# Altium PCB PCB1.PcbDoc (part 2 of 2)
Units mm, origin at the board's own origin, x right, y up, seen from the top; angles counter-clockwise.
Board outline 352.42 x 119.06 mm, 2 copper layers (Top Layer, Bottom Layer); 104 components, 225 nets, 1613 pads, 36 vias.
Unrouted connection lines stored in the file: 300.
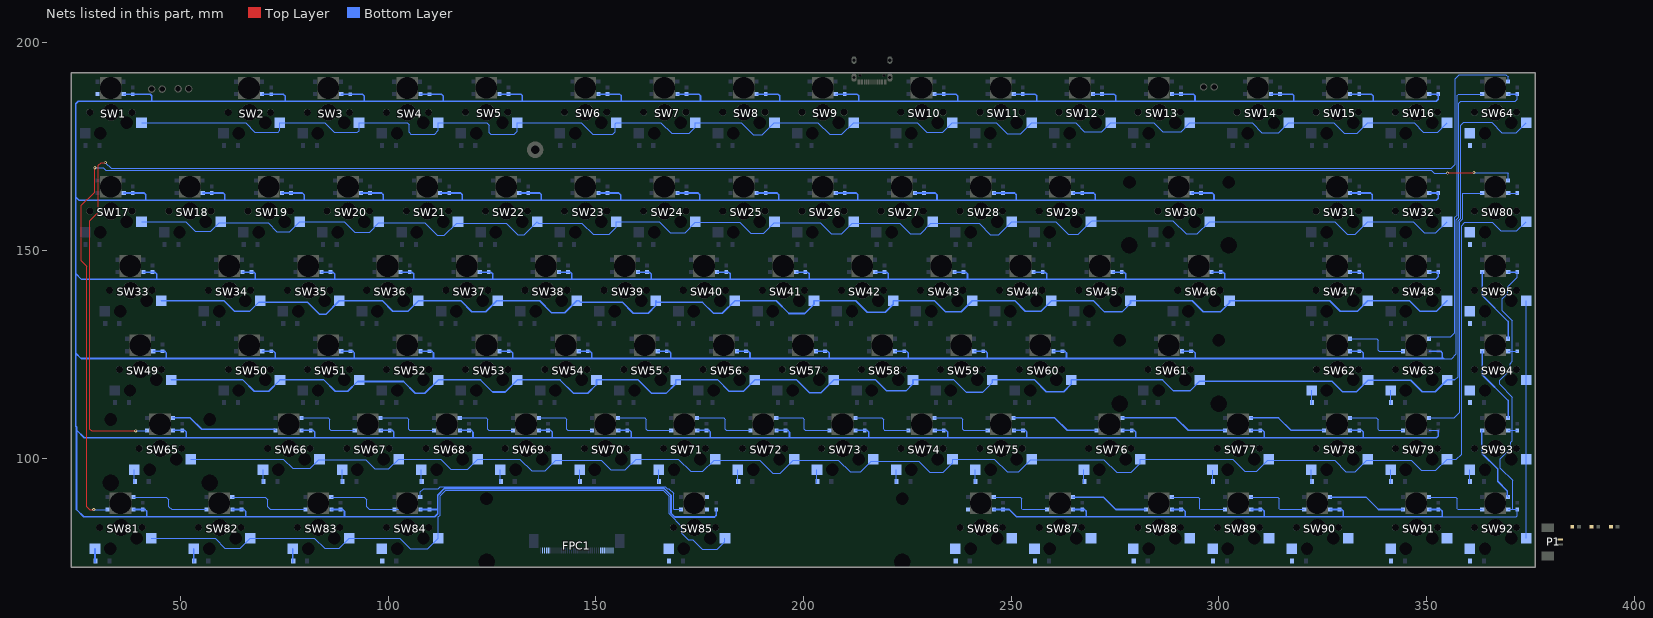
[diagram p2: the nets of this part, all layers, seen from the top]

## Via types
v1: diameter 0.762, hole 0.381, Top Layer to Bottom Layer, 35 vias
v2: diameter 0.635, hole 0.381, Top Layer to Bottom Layer, 1 vias

## Nets (pads, with @x,y where several pads share a name; then routed paths per layer and width w, separated by ;. In a path a pad name is that pad's centre, name@x,y a point inside that pad or via, vN(x,y) a via of type N, cw(c..) or ccw(c..) an arc to the next point about the centre after c; other vN are vias at no path point) (continued)
NetSW62_2: SW62.2 SW62.3 | length 3.3
  Bottom Layer w0.254: SW62.3@322.351,113.077 SW62.2@322.351,116.332
NetSW62_6: SW62.6 SW63.8 | length 15.5
  Bottom Layer w0.254: SW62.6@331.597,128.778 338.023,128.778 338.404,128.397 338.404,126.009 338.633,125.781 SW63.8@344.424,125.781
NetSW63_2: SW63.2 SW63.3 | length 3.3
  Bottom Layer w0.254: SW63.3@341.389,113.077 SW63.2@341.389,116.332
NetSW63_6: SW63.6 SW64.8 | length 70.4
  Bottom Layer w0.254: SW63.6@350.634,128.778 351.091,129.235 355.879,129.235 356.845,130.2 356.845,157.988 357.429,158.572 357.429,187.376 357.759,187.706 SW64.8@363.449,187.706
NetSW64_2: SW64.2 SW64.3
NetSW64_6: SW64.6 SW65.8 | length 441.4
  Top Layer w0.254: v1(31.953,171.221) 30.937,171.221 30.277,170.561 30.277,159.258 28.194,157.175 28.194,107.036 28.626,106.604 v1(39.268,106.604)
  Bottom Layer w0.254: v1(31.953,171.221) 33.299,169.875 356.006,169.875 356.972,170.84 356.972,191.44 357.937,192.405 369.087,192.405 369.672,191.821 SW64.6@369.672,190.703 ; v1(39.268,106.604) 41.834,106.604 SW65.8@41.961,106.731
NetSW65_2: SW65.2 SW65.3 | length 3.3
  Bottom Layer w0.254: SW65.3@38.938,94.027 SW65.2@38.938,97.282
NetSW65_6: SW65.6 SW66.8 | length 26
  Bottom Layer w0.381: SW65.6@48.184,109.728 52.4,109.728 55.143,106.985 72.669,106.985 SW66.8@72.923,106.731
NetSW66_2: SW66.2 SW66.3 | length 3.3
  Bottom Layer w0.254: SW66.3@69.901,94.027 SW66.2@69.901,97.282
NetSW66_6: SW66.6 SW67.8 | length 15.5
  Bottom Layer w0.254: SW66.6@79.121,109.728 85.547,109.728 85.928,109.347 85.928,106.959 86.157,106.731 SW67.8@91.948,106.731
NetSW67_2: SW67.2 SW67.3 | length 3.3
  Bottom Layer w0.254: SW67.3@88.954,94.027 SW67.2@88.954,97.282
NetSW67_6: SW67.6 SW68.8 | length 15.5
  Bottom Layer w0.254: SW67.6@98.174,109.728 104.6,109.728 104.981,109.347 104.981,106.959 105.21,106.731 SW68.8@111.001,106.731
NetSW68_2: SW68.2 SW68.3 | length 3.3
  Bottom Layer w0.254: SW68.3@108.006,94.027 SW68.2@108.006,97.282
NetSW68_6: SW68.6 SW69.8 | length 15.5
  Bottom Layer w0.254: SW68.6@117.227,109.728 123.653,109.728 124.034,109.347 124.034,106.959 124.262,106.731 SW69.8@130.054,106.731
NetSW69_2: SW69.2 SW69.3 | length 3.3
  Bottom Layer w0.254: SW69.3@127.059,94.027 SW69.2@127.059,97.282
NetSW69_6: SW69.6 SW70.8 | length 15.5
  Bottom Layer w0.254: SW69.6@136.279,109.728 142.706,109.728 143.087,109.347 143.087,106.959 143.315,106.731 SW70.8@149.106,106.731
NetSW70_2: SW70.2 SW70.3 | length 3.3
  Bottom Layer w0.254: SW70.3@146.112,94.027 SW70.2@146.112,97.282
NetSW70_6: SW70.6 SW71.8 | length 15.5
  Bottom Layer w0.254: SW70.6@155.332,109.728 161.758,109.728 162.139,109.347 162.139,106.959 162.368,106.731 SW71.8@168.159,106.731
NetSW71_2: SW71.2 SW71.3 | length 3.3
  Bottom Layer w0.254: SW71.3@165.165,94.027 SW71.2@165.165,97.282
NetSW71_6: SW71.6 SW72.8 | length 15.5
  Bottom Layer w0.254: SW71.6@174.385,109.728 180.811,109.728 181.192,109.347 181.192,106.959 181.421,106.731 SW72.8@187.212,106.731
NetSW72_2: SW72.2 SW72.3 | length 3.3
  Bottom Layer w0.254: SW72.3@184.218,94.027 SW72.2@184.218,97.282
NetSW72_6: SW72.6 SW73.8 | length 15.5
  Bottom Layer w0.254: SW72.6@193.438,109.728 199.864,109.728 200.245,109.347 200.245,106.959 200.474,106.731 SW73.8@206.265,106.731
NetSW73_2: SW73.2 SW73.3 | length 3.3
  Bottom Layer w0.254: SW73.3@203.271,94.027 SW73.2@203.271,97.282
NetSW73_6: SW73.6 SW74.8 | length 15.5
  Bottom Layer w0.254: SW73.6@212.491,109.728 218.917,109.728 219.298,109.347 219.298,106.959 219.527,106.731 SW74.8@225.318,106.731
NetSW74_2: SW74.2 SW74.3 | length 3.3
  Bottom Layer w0.254: SW74.3@222.323,94.027 SW74.2@222.323,97.282
NetSW74_6: SW74.6 SW75.8 | length 15.5
  Bottom Layer w0.254: SW74.6@231.544,109.728 237.97,109.728 238.351,109.347 238.351,106.959 238.579,106.731 SW75.8@244.371,106.731
NetSW75_2: SW75.2 SW75.3 | length 3.3
  Bottom Layer w0.254: SW75.3@241.376,94.027 SW75.2@241.376,97.282
NetSW75_6: SW75.6 SW76.8 | length 21.2
  Bottom Layer w0.381: SW75.6@250.622,109.728 260.528,109.728 263.525,106.731 SW76.8@270.586,106.731
NetSW76_2: SW76.2 SW76.3 | length 3.3
  Bottom Layer w0.254: SW76.3@267.564,94.027 SW76.2@267.564,97.282
NetSW76_6: SW76.6 SW77.8 | length 26
  Bottom Layer w0.381: SW76.6@276.809,109.728 289.636,109.728 292.633,106.731 SW77.8@301.523,106.731
NetSW77_2: SW77.2 SW77.3 | length 3.3
  Bottom Layer w0.254: SW77.3@298.602,93.849 SW77.2@298.602,97.104
NetSW77_6: SW77.6 SW78.8 | length 18.8
  Bottom Layer w0.381: SW77.6@307.746,109.728 314.401,109.728 317.398,106.731 SW78.8@325.349,106.731
NetSW78_2: SW78.2 SW78.3 | length 3.3
  Bottom Layer w0.254: SW78.3@322.326,94.027 SW78.2@322.326,97.282
NetSW78_6: SW78.6 SW79.8 | length 15.5
  Bottom Layer w0.254: SW78.6@331.546,109.728 337.972,109.728 338.353,109.347 338.353,106.959 338.582,106.731 SW79.8@344.373,106.731
NetSW79_2: SW79.2 SW79.3 | length 3.3
  Bottom Layer w0.254: SW79.3@341.376,94.027 SW79.2@341.376,97.282
NetSW79_6: SW79.6 SW80.8 | length 65.8
  Bottom Layer w0.254: SW79.6@350.622,109.728 356.743,109.728 358.064,111.049 358.064,156.912 358.8,157.648 358.8,163.881 SW80.8@363.449,163.881
NetSW80_2: SW80.2 SW80.3
NetSW80_6: SW80.6 SW81.8 | length 431.4
  Top Layer w0.254: v1(29.134,87.655) 28.169,87.655 27.432,88.392 27.432,146.304 26.187,147.549 26.187,160.884 29.413,164.109 v1(29.413,169.977) ; v1(355.092,168.681) 355.194,168.783 v1(361.442,168.783)
  Bottom Layer w0.254: v1(29.134,87.655) SW81.8@32.436,87.655 ; v1(29.413,169.977) 31.471,169.977 32.055,169.393 351.155,169.393 351.866,168.681 v1(355.092,168.681) ; v1(361.442,168.783) 369.57,168.783 369.672,168.681 SW80.6@369.672,166.878
NetSW81_2: SW81.2 SW81.3 | length 3.3
  Bottom Layer w0.381: SW81.3@29.439,74.977 SW81.2@29.439,78.232
NetSW81_6: SW81.6 SW82.8 | length 19.8
  Bottom Layer w0.254: SW81.6@38.684,90.678 46.609,90.678 47.219,90.068 47.219,88.341 47.879,87.681 SW82.8@56.274,87.681
NetSW82_2: SW82.2 SW82.3 | length 3.3
  Bottom Layer w0.381: SW82.3@53.251,74.977 SW82.2@53.251,78.232
NetSW82_6: SW82.6 SW83.8 | length 19.8
  Bottom Layer w0.254: SW82.6@62.497,90.678 70.421,90.678 71.031,90.068 71.031,88.341 71.691,87.681 SW83.8@80.086,87.681
NetSW83_2: SW83.2 SW83.3 | length 3.3
  Bottom Layer w0.381: SW83.3@77.064,74.977 SW83.2@77.064,78.232
NetSW83_6: SW83.6 SW84.8 | length 19.8
  Bottom Layer w0.254: SW83.6@86.309,90.678 94.234,90.678 94.844,90.068 94.844,88.341 95.504,87.681 103.899,87.681
NetSW84_2: SW84.2 SW84.3
NetSW84_6: SW84.6 SW85.8 | length 69.1
  Bottom Layer w0.254: SW84.6@107.747,90.678 107.747,91.923 108.56,92.735 112.065,92.735 112.535,93.205 166.717,93.205 167.187,92.735 167.589,92.735 168.758,91.567 168.758,87.782 168.859,87.681 SW85.8@170.561,87.681
NetSW85_2: SW85.2 SW85.3
NetSW85_6: SW85.6 SW86.8
NetSW86_2: SW86.2 SW86.3
NetSW86_6: SW86.6 SW87.8 | length 15.5
  Bottom Layer w0.254: SW86.6@245.821,90.678 252.247,90.678 252.628,90.297 252.628,87.909 252.857,87.681 SW87.8@258.648,87.681
NetSW87_2: SW87.2 SW87.3
NetSW87_6: SW87.6 SW88.8 | length 18.8
  Bottom Layer w0.381: SW87.6@264.897,90.678 272.212,90.678 275.209,87.681 SW88.8@282.473,87.681
NetSW88_2: SW88.2 SW88.3
NetSW88_6: SW88.6 SW89.8 | length 15.5
  Bottom Layer w0.254: SW88.6@288.671,90.678 295.097,90.678 295.478,90.297 295.478,87.909 295.707,87.681 SW89.8@301.498,87.681
NetSW89_2: SW89.2 SW89.3
NetSW89_6: SW89.6 SW90.8 | length 15.5
  Bottom Layer w0.254: SW89.6@307.746,90.678 314.173,90.678 314.554,90.297 314.554,87.909 314.782,87.681 SW90.8@320.573,87.681
NetSW90_2: SW90.2 SW90.3
NetSW90_6: SW90.6 SW91.8 | length 18.8
  Bottom Layer w0.381: SW90.6@326.822,90.678 335.483,90.678 338.48,87.681 SW91.8@344.399,87.681
NetSW91_2: SW91.2 SW91.3
NetSW91_6: SW91.6 SW92.8 | length 15.5
  Bottom Layer w0.254: SW91.6@350.596,90.678 357.022,90.678 357.403,90.297 357.403,87.909 357.632,87.681 SW92.8@363.423,87.681
NetSW92_2: SW92.2 SW92.3
NetSW92_6: SW92.6 SW93.8 | length 18.7
  Bottom Layer w0.381: SW93.8@363.449,106.731 363.322,106.604 363.322,101.244 367.157,97.409 367.157,94.456 369.516,92.097 369.516,90.834 SW92.6@369.672,90.678
NetSW93_2: SW93.2 SW93.3 | length 3.3
  Bottom Layer w0.254: SW93.3@360.426,94.027 SW93.2@360.426,97.282
NetSW93_6: SW93.6 SW94.8 | length 18.6
  Bottom Layer w0.381: SW94.8@363.449,125.781 363.449,120.142 369.672,113.919 SW93.6@369.672,109.728
NetSW94_2: SW94.2 SW94.3
NetSW94_6: SW94.6 SW95.8 | length 18.6
  Bottom Layer w0.381: SW95.8@363.449,144.831 363.449,139.192 369.672,132.969 SW94.6@369.672,128.778
NetSW95_2: SW95.2 SW95.3
PD+: FPC1.32
PD-: FPC1.33
RGB: FPC1.34 SW1.8
ROW1: FPC1.1 SW1.1 SW2.1 SW3.1 SW4.1 SW5.1 SW6.1 SW7.1 SW8.1 SW9.1 SW10.1 SW11.1 SW12.1 SW13.1 SW14.1 SW15.1 SW16.1 | length 353.5
  Bottom Layer w0.254: SW1.1@40.64,180.772 65.684,180.772 67.92,178.537 73.558,178.537 73.965,178.943 SW2.1@73.965,180.772 84.785,180.772 87.071,178.486 92.608,178.486 93.015,178.892 SW3.1@93.015,180.772 104.597,180.772 105.054,180.315 105.054,178.537 105.512,178.079 111.201,178.079 112.065,178.943 SW4.1@112.065,180.772 123.825,180.772 124.409,180.188 124.409,178.333 124.739,178.003 130.327,178.003 131.115,178.791 SW5.1@131.115,180.797 146.558,180.797 149.301,178.054 154.102,178.054 154.686,178.638 154.686,180.543 SW6.1@154.94,180.797 165.684,180.797 168.25,178.232 172.542,178.232 173.99,179.68 SW7.1@173.99,180.797 184.988,180.797 187.909,177.876 190.119,177.876 SW8.1@193.04,180.797 203.505,180.797 206.324,177.978 209.271,177.978 SW9.1@212.09,180.797 227.457,180.797 229.743,178.511 233.604,178.511 SW10.1@235.89,180.797 246.456,180.797 249.047,178.206 252.349,178.206 SW11.1@254.94,180.797 265.557,180.797 267.665,178.689 271.882,178.689 SW12.1@273.99,180.797 284.378,180.797 286.487,178.689 290.932,178.689 SW13.1@293.04,180.797 308.026,180.797 310.388,178.435 314.503,178.435 SW14.1@316.865,180.797 327.66,180.797 330.175,178.283 333.4,178.283 SW15.1@335.915,180.797 347.066,180.797 349.301,178.562 352.73,178.562 SW16.1@354.965,180.797
ROW2: FPC1.2 SW17.1 SW18.1 SW19.1 SW20.1 SW21.1 SW22.1 SW23.1 SW24.1 SW25.1 SW26.1 SW27.1 SW28.1 SW29.1 SW30.1 SW31.1 SW32.1 | length 348.9
  Bottom Layer w0.254: SW17.1@40.64,156.972 51.283,156.972 53.619,154.635 57.353,154.635 59.385,156.667 71.12,156.667 73.254,154.534 76.302,154.534 SW19.1@78.74,156.972 89.459,156.972 91.999,154.432 95.555,154.432 97.79,156.667 108.89,156.667 111.836,153.721 113.589,153.721 116.484,156.616 128.448,156.616 131.191,153.873 132.791,153.873 SW22.1@135.89,156.972 136.22,156.642 146.685,156.642 149.377,153.949 153.238,153.949 154.94,155.651 SW23.1@154.94,156.972 165.252,156.972 167.919,154.305 171.501,154.305 173.99,156.794 184.709,156.794 187.325,154.178 190.475,154.178 193.04,156.743 204.013,156.743 206.654,154.102 209.22,154.102 211.76,156.642 223.241,156.642 225.755,154.127 228.295,154.127 230.708,156.54 242.367,156.54 245.034,153.873 247.091,153.873 SW28.1@250.19,156.972 260.706,156.972 263.728,153.949 266.217,153.949 SW29.1@269.24,156.972 269.519,157.251 288.95,157.251 292.176,154.026 294.869,154.026 SW30.1@297.815,156.972 327.939,156.972 330.987,153.924 332.867,153.924 SW31.1@335.915,156.972 346.812,156.972 349.504,154.28 352.273,154.28 SW32.1@354.965,156.972
ROW3: FPC1.3 SW33.1 SW34.1 SW35.1 SW36.1 SW37.1 SW38.1 SW39.1 SW40.1 SW41.1 SW42.1 SW43.1 SW44.1 SW45.1 SW46.1 SW47.1 SW48.1 | length 345.4
  Bottom Layer w0.381: SW33.1@45.415,137.922 60.477,137.922 62.941,135.458 66.751,135.458 68.834,137.541 80.645,137.541 83.49,134.696 85.039,134.696 SW35.1@88.265,137.922 98.654,137.922 101.143,135.433 104.826,135.433 SW36.1@107.315,137.922 117.551,137.922 120.167,135.306 123.546,135.306 126.162,137.922 SW37.1@126.365,137.922 136.525,137.922 139.37,135.077 142.57,135.077 SW38.1@145.415,137.922 145.999,137.922 146.304,137.617 156.388,137.617 159.055,134.95 162.636,134.95 164.465,136.779 SW39.1@164.465,137.922 164.846,137.541 175.717,137.541 178.359,134.899 180.492,134.899 SW40.1@183.515,137.922 193.472,137.922 196.52,134.874 200.355,134.874 202.565,137.084 SW41.1@202.565,137.922 212.623,137.922 215.367,135.179 219.71,135.179 221.615,137.084 SW42.1@221.615,137.922 231.572,137.922 234.213,135.28 238.023,135.28 SW43.1@240.665,137.922 250.952,137.922 253.441,135.433 257.226,135.433 SW44.1@259.715,137.922 269.85,137.922 272.517,135.255 276.708,135.255 278.765,137.312 SW45.1@278.765,137.922 293.649,137.922 296.266,135.306 300.406,135.306 302.59,137.49 SW46.1@302.59,137.922 326.72,137.922 329.235,135.407 333.4,135.407 SW47.1@335.915,137.922 345.948,137.922 348.463,135.407 352.45,135.407 SW48.1@354.965,137.922
ROW4: FPC1.4 SW49.1 SW50.1 SW51.1 SW52.1 SW53.1 SW54.1 SW55.1 SW56.1 SW57.1 SW58.1 SW59.1 SW60.1 SW61.1 SW62.1 SW63.1 SW64.1 | length 424.7
  Bottom Layer w0.254: 356.832,118.872 357.657,119.697 357.657,157.251 358.242,157.836 358.242,180.213 358.953,180.924 365.709,180.924 368.198,178.435 371.653,178.435 SW64.1@374.015,180.797
  Bottom Layer w0.381: SW49.1@47.777,118.872 65.049,118.872 67.767,116.154 71.272,116.154 SW50.1@73.99,118.872 84.557,118.872 87.274,116.154 90.322,116.154 92.659,118.491 103.734,118.491 106.578,115.646 108.864,115.646 SW52.1@112.09,118.872 122.276,118.872 125.171,115.976 128.245,115.976 SW53.1@131.14,118.872 141.427,118.872 144.628,115.672 148.107,115.672 150.19,117.754 SW54.1@150.19,118.872 160.249,118.872 163.5,115.621 166.929,115.621 169.24,117.932 SW55.1@169.24,118.872 179.426,118.872 182.118,116.18 185.598,116.18 SW56.1@188.29,118.872 198.374,118.872 201.422,115.824 204.292,115.824 SW57.1@207.34,118.872 217.424,118.872 220.066,116.23 224.688,116.23 226.39,117.932 SW58.1@226.39,118.872 236.245,118.872 239.166,115.951 243.23,115.951 245.44,118.161 SW59.1@245.44,118.872 255.676,118.872 258.496,116.053 262.661,116.053 264.49,117.881 SW60.1@264.49,118.872 286.461,118.872 289.103,116.23 293.091,116.23 295.453,118.593 327.203,118.593 329.717,116.078 333.248,116.078 335.94,118.77 346.227,118.77 348.996,116.002 352.108,116.002 354.927,118.821 SW63.1@354.978,118.821 ; SW63.1@354.978,118.872 356.832,118.872
ROW5: FPC1.5 SW65.1 SW66.1 SW67.1 SW68.1 SW69.1 SW70.1 SW71.1 SW72.1 SW73.1 SW74.1 SW75.1 SW76.1 SW77.1 SW78.1 SW79.1 SW80.1 | length 411.4
  Bottom Layer w0.254: SW65.1@52.527,99.822 74.752,99.822 77.013,97.561 81.229,97.561 83.312,99.644 94.666,99.644 96.825,97.485 100.206,97.485 SW67.1@102.543,99.822 112.649,99.822 115.113,97.358 119.132,97.358 SW68.1@121.595,99.822 131.699,99.822 134.544,96.977 137.803,96.977 140.343,99.517 151.384,99.517 153.619,97.282 157.161,97.282 SW70.1@159.701,99.822 169.926,99.822 172.898,96.85 175.782,96.85 178.5,99.568 189.509,99.568 192.659,96.418 194.403,96.418 197.553,99.568 208.432,99.568 211.252,96.749 213.786,96.749 216.352,99.314 227.762,99.314 230.403,96.672 233.68,96.672 235.912,98.905 SW74.1@235.912,99.822 245.974,99.822 249.047,96.749 251.892,96.749 254.787,99.644 272.364,99.644 275.412,96.596 278.892,96.596 281.153,98.857 SW76.1@281.153,99.822 303.352,99.822 306.299,96.876 309.143,96.876 311.785,99.517 327.889,99.517 330.606,96.799 332.892,96.799 335.636,99.543 346.38,99.543 348.767,97.155 352.298,97.155 SW79.1@354.965,99.822 357.251,99.822 358.47,101.041 358.47,155.981 359.283,156.794 365.887,156.794 367.944,154.737 371.78,154.737 SW80.1@374.015,156.972
ROW6: FPC1.6 pad.4@123.723,75.057 SW81.1 SW82.1 SW83.1 SW84.1 SW85.1 SW86.1 SW87.1 SW88.1 SW89.1 SW90.1 SW91.1 SW92.1 SW93.1 SW94.1 SW95.1 | length 222.7
  Bottom Layer w0.254: SW81.1@43.028,80.772 58.344,80.772 60.731,78.384 64.453,78.384 SW82.1@66.84,80.772 82.271,80.772 84.709,78.334 88.214,78.334 SW83.1@90.653,80.772 102.87,80.772 105.385,78.257 109.576,78.257 SW84.1@112.09,80.772 112.09,85.877 112.547,86.335 112.547,90.932 113.881,92.266 166.281,92.266 167.653,90.894 167.653,86.597 170.713,83.536 170.713,81.966 172.263,80.416 173.304,80.416 175.641,78.08 179.273,78.08 181.127,79.934 SW85.1@181.127,80.772 ; SW92.1@374.015,80.772 SW93.1@374.015,99.822 SW94.1@374.015,118.872 SW95.1@374.015,137.922
ROW7: FPC1.7
V3_3: FPC1.35 R1.1 R2.1 R3.1
VBAT: P1.2
VBUS: SW1.5 SW2.5 SW3.5 SW4.5 SW5.5 SW6.5 SW7.5 SW8.5 SW9.5 SW10.5 SW11.5 SW12.5 SW13.5 SW14.5 SW15.5 SW16.5 SW17.5 SW18.5 SW19.5 SW20.5 SW21.5 SW22.5 SW23.5 SW24.5 SW25.5 SW26.5 SW27.5 SW28.5 SW29.5 SW30.5 SW31.5 SW32.5 SW33.5 SW34.5 SW35.5 SW36.5 SW37.5 SW38.5 SW39.5 SW40.5 SW41.5 SW42.5 SW43.5 SW44.5 SW45.5 SW46.5 SW47.5 SW48.5 SW49.5 SW50.5 SW51.5 SW52.5 SW53.5 SW54.5 SW55.5 SW56.5 SW57.5 SW58.5 SW59.5 SW60.5 SW61.5 SW62.5 SW64.5 SW65.5 SW66.5 SW67.5 SW68.5 SW69.5 SW70.5 SW71.5 SW72.5 SW73.5 SW74.5 SW75.5 SW76.5 SW77.5 SW78.5 SW80.5 SW81.5 SW82.5 SW83.5 SW84.5 SW85.5 SW86.5 SW87.5 SW88.5 SW89.5 SW90.5 SW91.5 SW92.5 SW93.5 SW94.5 SW95.5 | length 2664.7
  Bottom Layer w0.254: 350.672,106.731 352.857,106.731 ; 353.822,85.954 371.678,85.954 371.907,86.182 SW92.5@371.907,87.681 ; 354.127,124.028 356.057,124.028 357.251,125.222 357.251,157.48 357.835,158.064 357.835,185.445 358.318,185.928 371.399,185.928 371.907,186.436 SW64.5@371.907,187.706 ; SW92.5@369.722,87.681 370.738,87.681 ; SW93.5@369.722,106.731 370.713,106.731 ; SW94.5@369.722,125.781 370.688,125.781 ; SW80.5@369.722,163.881 SW80.5@371.907,163.881 ; SW92.5@371.856,87.681 370.738,87.681 ; SW93.5@371.907,106.731 370.713,106.731 ; SW94.5@371.907,125.781 370.688,125.781 ; SW95.5@371.907,144.831 371.907,143.612 369.595,141.3 369.595,139.776 368.249,138.43 368.249,135.56 370.688,133.121 370.688,125.781 ; 370.688,125.781 370.688,123.317 370.192,122.822 370.192,121.323 367.614,118.745 367.614,117.856 370.713,114.757 370.713,106.731 ; 370.713,106.731 370.713,104.216 370.332,103.835 370.332,102.387 367.843,99.898 367.843,97.561 370.738,94.666 370.738,87.681
  Bottom Layer w0.381: SW17.5@36.347,163.881 SW17.5@38.532,163.881 41.275,163.881 41.681,163.474 41.681,162.128 ; SW1.5@36.347,187.681 SW1.5@38.532,187.681 42.723,187.681 43.104,187.3 43.104,185.953 ; SW81.5@38.735,87.681 41.478,87.681 41.885,87.274 41.885,85.928 ; SW33.5@41.123,144.831 43.866,144.831 44.272,144.424 44.272,143.078 ; SW49.5@43.485,125.781 46.228,125.781 46.634,125.374 46.634,124.028 ; SW65.5@48.235,106.731 50.978,106.731 51.384,106.324 51.384,104.978 ; SW18.5@55.397,163.881 SW18.5@57.582,163.881 60.325,163.881 60.731,163.474 60.731,162.128 ; SW82.5@62.547,87.681 65.291,87.681 65.697,87.274 65.697,85.928 ; SW34.5@64.922,144.831 67.666,144.831 68.072,144.424 68.072,143.078 ; SW2.5@69.672,187.681 SW2.5@71.857,187.681 74.778,187.681 75.209,187.249 75.209,185.953 ; SW50.5@69.698,125.781 72.441,125.781 72.847,125.374 72.847,124.028 ; SW19.5@74.447,163.881 SW19.5@76.632,163.881 79.375,163.881 79.781,163.474 79.781,162.128 ; SW66.5@79.197,106.731 81.94,106.731 82.347,106.324 82.347,104.978 ; SW35.5@83.972,144.831 86.716,144.831 87.122,144.424 87.122,143.078 ; SW83.5@86.36,87.681 89.103,87.681 89.51,87.274 89.51,85.928 ; SW3.5@88.722,187.681 SW3.5@90.907,187.681 93.828,187.681 94.259,187.249 94.259,185.953 ; SW51.5@88.748,125.781 91.491,125.781 91.897,125.374 91.897,124.028 ; SW20.5@93.497,163.881 SW20.5@95.682,163.881 98.425,163.881 98.831,163.474 98.831,162.128 ; SW67.5@98.25,106.731 100.993,106.731 101.4,106.324 101.4,104.978 ; SW36.5@103.022,144.831 105.766,144.831 106.172,144.424 106.172,143.078 ; SW4.5@107.772,187.681 SW4.5@109.957,187.681 112.878,187.681 113.309,187.249 113.309,185.953 ; SW84.5@107.798,87.681 SW84.5@109.982,87.681 111.912,87.681 ; SW52.5@107.798,125.781 110.541,125.781 110.947,125.374 110.947,124.028 ; SW21.5@112.547,163.881 SW21.5@114.732,163.881 117.475,163.881 117.881,163.474 117.881,162.128 ; SW68.5@117.303,106.731 120.046,106.731 120.452,106.324 120.452,104.978 ; SW37.5@122.072,144.831 124.816,144.831 125.222,144.424 125.222,143.078 ; SW5.5@126.822,187.706 SW5.5@129.007,187.706 131.928,187.706 132.359,187.274 132.359,185.979 ; SW53.5@126.848,125.781 129.591,125.781 129.997,125.374 129.997,124.028 ; SW22.5@131.597,163.881 SW22.5@133.782,163.881 136.525,163.881 136.931,163.474 136.931,162.128 ; SW69.5@136.356,106.731 139.099,106.731 139.505,106.324 139.505,104.978 ; SW38.5@141.122,144.831 143.866,144.831 144.272,144.424 144.272,143.078 ; SW54.5@145.898,125.781 148.641,125.781 149.047,125.374 149.047,124.028 ; SW23.5@150.647,163.881 SW23.5@152.832,163.881 155.575,163.881 155.981,163.474 155.981,162.128 ; SW6.5@150.647,187.706 SW6.5@152.832,187.706 155.753,187.706 156.185,187.274 156.185,185.979 ; SW70.5@155.408,106.731 158.152,106.731 158.558,106.324 158.558,104.978 ; SW39.5@160.172,144.831 162.916,144.831 163.322,144.424 163.322,143.078 ; SW55.5@164.948,125.781 167.691,125.781 168.097,125.374 168.097,124.028 ; SW24.5@169.697,163.881 SW24.5@171.882,163.881 174.625,163.881 175.031,163.474 175.031,162.128 ; SW7.5@169.697,187.706 SW7.5@171.882,187.706 174.803,187.706 175.235,187.274 175.235,185.979 ; SW71.5@174.461,106.731 177.205,106.731 177.611,106.324 177.611,104.978 ; SW85.5@179.019,87.681 179.019,86.284 178.613,85.877 169.037,85.877 168.123,86.792 168.123,91.135 166.522,92.735 113.563,92.735 111.938,91.11 111.938,86.639 111.227,85.928 26.721,85.928 24.994,87.655 24.994,106.832 ; SW40.5@179.222,144.831 181.966,144.831 182.372,144.424 182.372,143.078 ; SW56.5@183.998,125.781 186.741,125.781 187.147,125.374 187.147,124.028 ; SW25.5@188.747,163.881 SW25.5@190.932,163.881 193.675,163.881 194.081,163.474 194.081,162.128 ; SW8.5@188.747,187.706 SW8.5@190.932,187.706 193.853,187.706 194.285,187.274 194.285,185.979 ; SW72.5@193.514,106.731 196.257,106.731 196.664,106.324 196.664,104.978 ; SW41.5@198.272,144.831 201.016,144.831 201.422,144.424 201.422,143.078 ; SW57.5@203.048,125.781 205.791,125.781 206.197,125.374 206.197,124.028 ; SW26.5@207.797,163.881 SW26.5@209.982,163.881 212.725,163.881 213.131,163.474 213.131,162.128 ; SW9.5@207.797,187.706 SW9.5@209.982,187.706 212.903,187.706 213.335,187.274 213.335,185.979 ; SW73.5@212.567,106.731 215.31,106.731 215.717,106.324 215.717,104.978 ; SW42.5@217.322,144.831 220.066,144.831 220.472,144.424 220.472,143.078 ; SW58.5@222.098,125.781 224.841,125.781 225.247,125.374 225.247,124.028 ; SW27.5@226.847,163.881 SW27.5@229.032,163.881 231.775,163.881 232.181,163.474 232.181,162.128 ; SW10.5@231.597,187.706 SW10.5@233.782,187.706 236.703,187.706 237.134,187.274 237.134,185.979 ; SW74.5@231.62,106.731 234.363,106.731 234.769,106.324 234.769,104.978 ; SW43.5@236.372,144.831 239.116,144.831 239.522,144.424 239.522,143.078 ; SW59.5@241.148,125.781 243.891,125.781 244.297,125.374 244.297,124.028 ; SW86.5@245.897,87.681 SW86.5@248.082,87.681 249.58,87.681 251.308,85.954 268.097,85.954 ; SW28.5@245.897,163.881 SW28.5@248.082,163.881 250.825,163.881 251.231,163.474 251.231,162.128 ; SW11.5@250.647,187.706 SW11.5@252.832,187.706 255.753,187.706 256.184,187.274 256.184,185.979 ; SW75.5@250.673,106.731 253.416,106.731 253.822,106.324 253.822,104.978 ; SW44.5@255.422,144.831 258.166,144.831 258.572,144.424 258.572,143.078 ; SW60.5@260.198,125.781 262.941,125.781 263.347,125.374 263.347,124.028 ; SW87.5@264.947,87.681 267.691,87.681 268.097,87.274 268.097,85.954 ; SW29.5@264.947,163.881 SW29.5@267.132,163.881 269.875,163.881 270.281,163.474 270.281,162.128 ; SW12.5@269.697,187.706 SW12.5@271.882,187.706 274.803,187.706 275.234,187.274 275.234,185.979 ; SW45.5@274.472,144.831 277.216,144.831 277.622,144.424 277.622,143.078 ; SW76.5@276.86,106.731 279.603,106.731 280.01,106.324 280.01,104.978 ; SW88.5@288.747,87.681 291.49,87.681 291.897,87.274 291.897,85.954 ; SW13.5@288.747,187.706 SW13.5@290.932,187.706 293.853,187.706 294.284,187.274 294.284,185.979 ; SW61.5@291.16,125.781 293.903,125.781 294.31,125.374 294.31,124.028 ; SW30.5@293.522,163.881 SW30.5@295.707,163.881 298.45,163.881 298.856,163.474 298.856,162.128 ; SW46.5@298.298,144.831 301.041,144.831 301.447,144.424 301.447,143.078 ; SW77.5@307.797,106.731 310.54,106.731 310.947,106.324 310.947,104.978 ; SW89.5@307.823,87.681 310.566,87.681 310.972,87.274 310.972,85.954 ; SW14.5@312.572,187.706 SW14.5@314.757,187.706 317.678,187.706 318.11,187.274 318.11,185.979 ; SW90.5@326.873,87.681 329.616,87.681 330.022,87.274 330.022,85.954 ; SW78.5@331.622,106.731 334.366,106.731 334.772,106.324 334.772,104.978 ; SW47.5@331.622,144.831 334.366,144.831 334.772,144.424 334.772,143.078 ; SW31.5@331.622,163.881 SW31.5@333.807,163.881 336.55,163.881 336.956,163.474 336.956,162.128 ; SW15.5@331.622,187.706 SW15.5@333.807,187.706 336.728,187.706 337.16,187.274 337.16,185.979 ; SW62.5@331.648,125.781 334.391,125.781 334.797,125.374 334.797,124.028 ; SW91.5@350.672,87.681 353.416,87.681 353.822,87.274 353.822,85.954 330.022,85.954 ; SW48.5@350.672,144.831 SW48.5@352.857,144.831 352.857,143.764 352.171,143.078 26.213,143.078 24.816,144.475 ; SW32.5@350.672,163.881 SW32.5@352.857,163.881 352.857,162.611 352.374,162.128 41.681,162.128 ; SW16.5@350.672,187.706 SW16.5@352.857,187.706 352.857,186.436 352.374,185.953 94.259,185.953 ; 350.685,125.781 353.428,125.781 353.835,125.374 353.835,124.028 ; 352.857,106.731 352.857,105.385 352.425,104.953 26.873,104.953 24.994,106.832 ; 354.127,124.028 353.835,124.028 ; SW95.5@369.722,144.831 SW95.5@371.907,144.831 ; SW64.5@369.722,187.706 SW64.5@371.907,187.706 ; 24.816,125.298 24.816,107.747 24.994,107.569 24.994,106.832 ; 24.816,125.298 24.816,144.475 ; 24.816,125.298 26.086,124.028 46.634,124.028 ; 24.816,144.475 24.816,162.916 ; 24.816,162.916 24.816,185.369 25.4,185.953 43.104,185.953 ; 24.816,162.916 25.603,162.128 41.681,162.128 ; 43.104,185.953 75.209,185.953 ; 46.634,124.028 72.847,124.028 ; 72.847,124.028 91.897,124.028 ; 75.209,185.953 94.259,185.953 ; 91.897,124.028 110.947,124.028 ; 110.947,124.028 129.997,124.028 ; 129.997,124.028 149.047,124.028 ; 149.047,124.028 168.097,124.028 ; 168.097,124.028 187.147,124.028 ; 187.147,124.028 206.197,124.028 ; 206.197,124.028 225.247,124.028 ; 225.247,124.028 244.297,124.028 ; 244.297,124.028 263.347,124.028 ; 263.347,124.028 294.31,124.028 ; 268.097,85.954 291.897,85.954 ; 291.897,85.954 310.972,85.954 ; 294.31,124.028 334.797,124.028 ; 310.972,85.954 330.022,85.954 ; 334.797,124.028 353.835,124.028
pads on no net: FPC1.27 FPC1.28 FPC1.29 FPC1.30 FPC1.31 FPC1.37 FPC1.38 P1.0 SW1. SW1.0 SW2. SW2.0 SW3. SW3.0 SW4. SW4.0 SW5. SW5.0 SW6. SW6.0 SW7. SW7.0 SW8. SW8.0 SW9. SW9.0 SW10. SW10.0 SW11. SW11.0 SW12. SW12.0 SW13. SW13.0 SW14. SW14.0 SW15. SW15.0 SW16. SW16.0 SW17. SW17.0 SW18. SW18.0 SW19. SW19.0 SW20. SW20.0 SW20.7 SW21. SW21.0 SW21.7 SW22. SW22.0 SW22.7 SW23. SW23.0 SW23.7 SW24. SW24.0 SW24.7 SW25. SW25.0 SW26. SW26.0 SW27. SW27.0 SW28. SW28.0 SW29. SW29.0 SW30. SW30.0 SW31. SW31.0 SW32. SW32.0 SW33. SW33.0 SW34. SW34.0 SW35. SW35.0 SW36. SW36.0 SW37. SW37.0 SW38. SW38.0 SW39. SW39.0 SW40. SW40.0 SW41. SW41.0 SW42. SW42.0 SW43. SW43.0 SW44. SW44.0 SW45. SW45.0 SW46. SW46.0 SW47. SW47.0 SW48. SW48.0 SW49. SW49.0 SW50. SW50.0 SW51. SW51.0 SW52. SW52.0 SW53. SW53.0 SW54. SW54.0 SW55. SW55.0 SW56. SW56.0 SW57. SW57.0 SW58. SW58.0 SW59. SW59.0 SW60. SW60.0 SW61. SW61.0 SW62. SW62.0 SW63. SW63.0 SW63.5 SW64. SW64.0 SW65. SW65.0 SW66. SW66.0 SW67. SW67.0 SW68. SW68.0 SW69. SW69.0 SW70. SW70.0 SW71. SW71.0 SW72. SW72.0 SW73. SW73.0 SW74. SW74.0 SW75. SW75.0 SW76. SW76.0 SW77. SW77.0 SW78. SW78.0 SW79. SW79.0 SW79.5 SW80. SW80.0 SW81. SW81.0 SW82. SW82.0 SW83. SW83.0 SW84. SW84.0 SW85. SW85.0 SW86. SW86.0 SW87. SW87.0 SW88. SW88.0 SW89. SW89.0 SW90. SW90.0 SW91. SW91.0 SW92. SW92.0 SW93. SW93.0 SW94. SW94.0 SW95. SW95.0 SW95.6 USBC1. USBC1.0 USBC1.A1 USBC1.A4 USBC1.A5 USBC1.A6 USBC1.A7 USBC1.A8 USBC1.A9 USBC1.A12 USBC1.B1 USBC1.B4 USBC1.B5 USBC1.B6 USBC1.B7 USBC1.B8 USBC1.B9 USBC1.B12

## Silkscreen, mask and mechanical layers (free items; w line width, h text height)
Mechanical 1:
  drawing of 2064 lines, arcs and shapes, not listed